# Altium PCB mergePCB.PcbDoc
Units mil, origin at the board's own origin, x right, y up, seen from the top; angles counter-clockwise.
Board outline 3350 x 2750 mil, 2 copper layers (Top Layer, Bottom Layer); 33 components, 30 nets, 147 pads, 8 vias.
Unrouted connection lines stored in the file: 11.
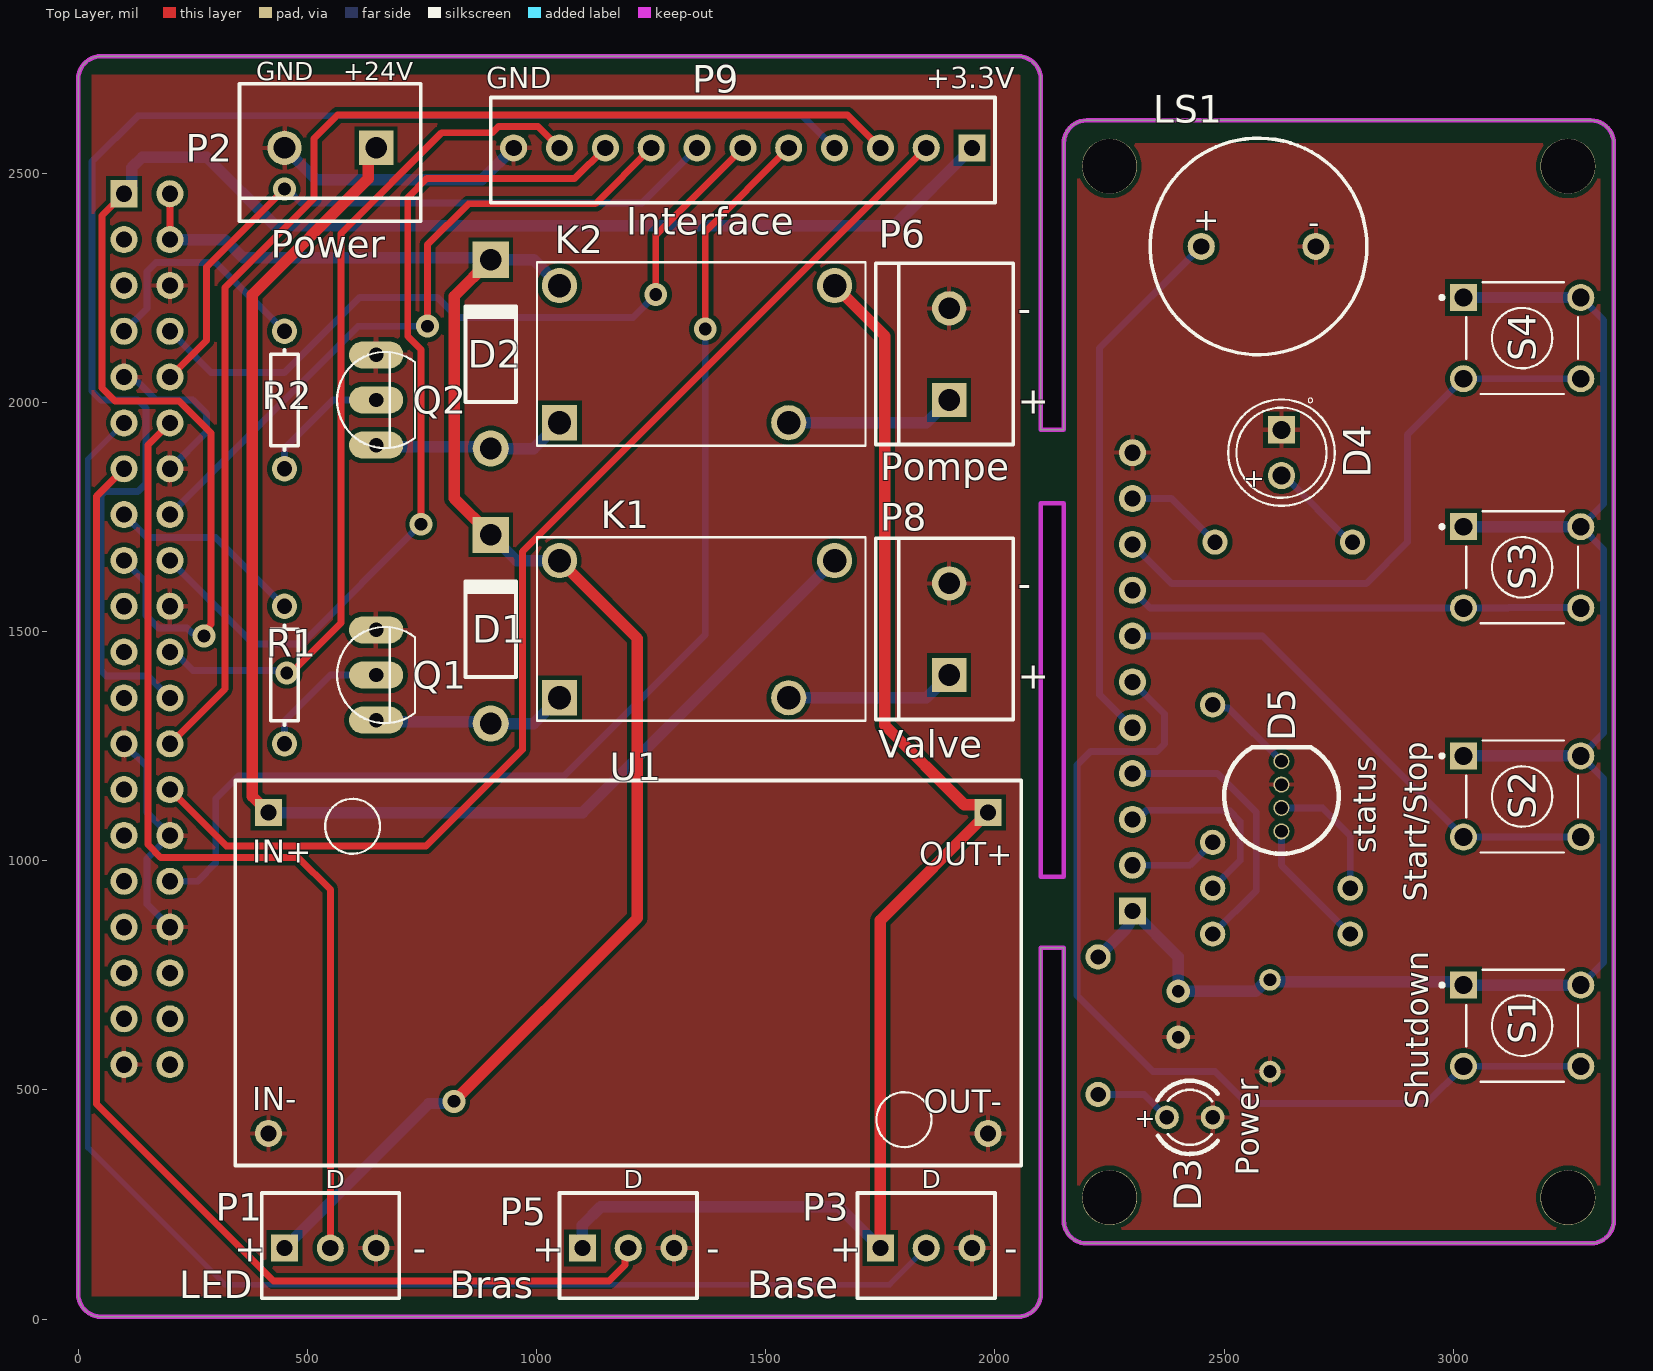
[diagram p0: Top Layer view]
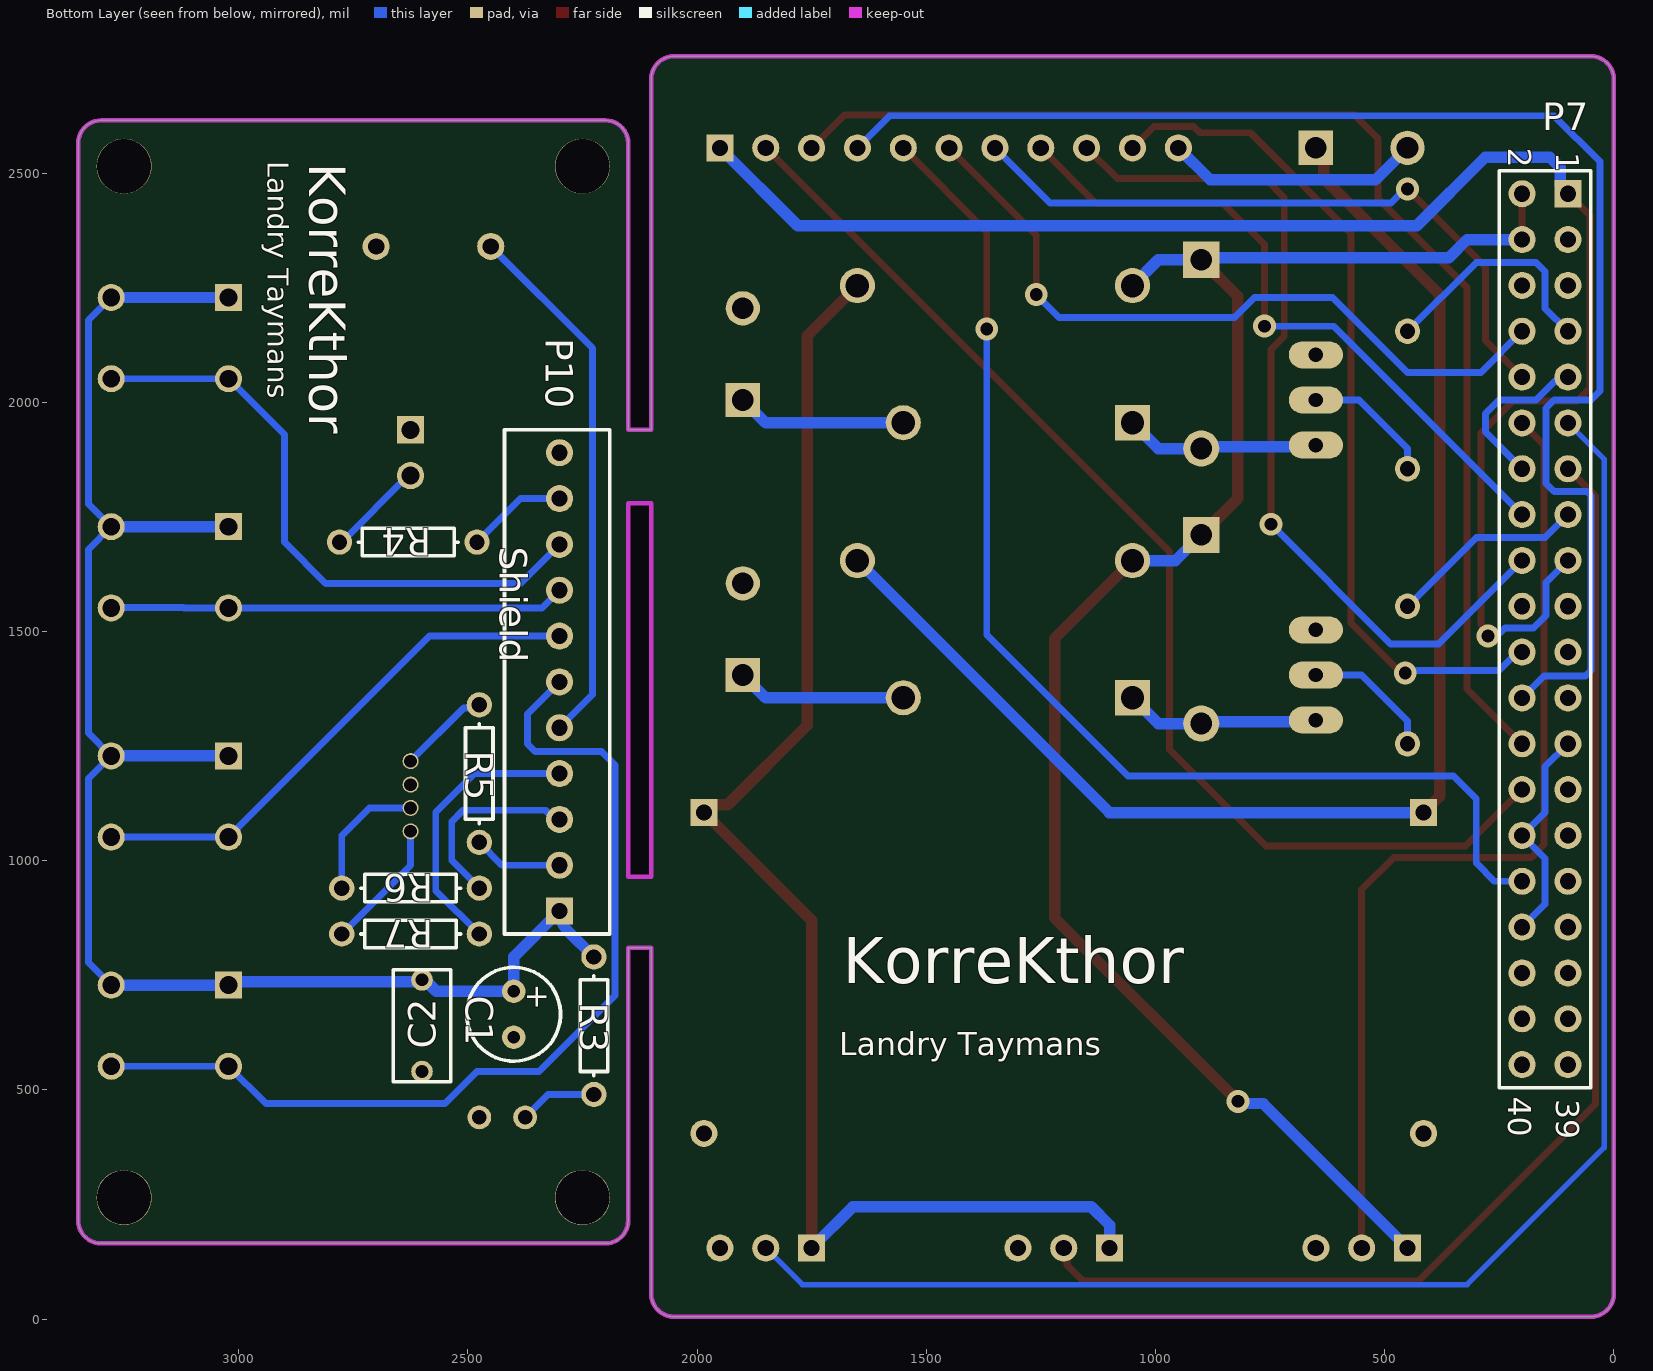
[diagram p1: Bottom Layer view, seen from below]

## Layer stack, top to bottom
Top Solder: solder mask 0.4, Solder Resist, Dk 3.5
Top Layer: signal copper 1.4
Dielectric 1: dielectric 12.6, FR-4, Dk 4.8
Bottom Layer: signal copper 1.4
Bottom Solder: solder mask 0.4, Solder Resist, Dk 3.5

## Board outline
50,5 2050,5 ccw(c2050,55) 2100,55 2100,810 2150,810 2150,215 ccw(c2200,215) 2200,165 3300,165 ccw(c3300,215) 3350,215 3350,2565 ccw(c3300,2565) 3300,2615 2200,2615 ccw(c2200,2565) 2150,2565 2150,1940 2100,1940 2100,2705 ccw(c2050,2705) 2050,2755 50,2755 ccw(c50,2705) 0,2705 0,55 ccw(c50,55)
cut-out: 2100,1780 2100,965 2150,965 2150,1780

## Design rules (kind name [scope] priority, off if disabled: settings)
Clearance [All] p1: gap=10 ignorepadtopadclearanceinfootprint=FALSE except(0: Arc-Hole Track-Hole SMDPad-Hole THPad-Hole Via-Hole Fill-Hole Poly-Hole Region-Hole Text-Hole)
PolygonConnect [All] p1: connectstyle=Relief reliefconductorwidth=10 reliefentries=4 polygonreliefangle="90 Angle" airgapwidth=10
RoutingVias [All] p1: holewidth=28 width=50 viastyle="Through Hole" minholewidth=28 minwidth=50 maxholewidth=28 maxwidth=50
SolderMaskExpansion [All] p1: expansion=4 istentingtop=FALSE
Width [All] p1: maxlimit=50 minlimit=10 preferedwidth=15
30 further rules are at their usual default settings.

## Classes and differential pairs
component class Shield: D1 D2 K1 K2 P1 P2 P3 P5 P6 P7 P8 P9 Q1 Q2 R1 R2 U1
component class Interface: C1 C2 D3 D4 D5 LS1 P10 R3 R4 R5 R6 R7 S1 S2 S3 S4

## Components (designator, comment, footprint, x,y, rotation, side; value= is the part's Value field where it differs from the comment)
C1 "Cap Pol1" Rad5.2 2400,665 r270 bottom value=10u
C2 "Cap" RAD-0.2 2600,640 r270 bottom value=100n
D1 "1N4004" DO-41 900,1505 r90 top
D2 "1N4004" DO-41 900,2105 r90 top
D3 "Power" LED_3MM 2425,440 r0 top
D4 "LED +" LED_5mm 2625,1890 r270 top
D5 "status" "LED RGB" 2625,1140 r90 top
K1 "Relay-SPST" RELAY_OJE-SH_series 1350,1505 r0 top
K2 "Relay-SPST" RELAY_OJE-SH_series 1350,2105 r0 top
LS1 "Buzzer" Buzzer 2575,2340 r0 top
P1 "LED" Conn_1X3 450,155 r0 top
P2 "Power" Bornier_1X2 550,2555 r180 top
P3 "Base" Conn_1X3 1750,155 r0 top
P5 "Bras" Conn_1X3 1100,155 r0 top
P6 "Pompe" Bornier_1X2 1900,2105 r90 top
P7 "Rasberry Pi Connector" HDR2X20 200,2455 r270 bottom
P8 "Valve" Bornier_1X2 1900,1505 r90 top
P9 "Interface" Conn_1X11 1950,2555 r180 top
P10 "Shield" Conn_1X11 2300,890 r90 bottom
Q1 "2N2222" TO-92 650,1405 r90 top
Q2 "2N2222" TO-92 650,2005 r90 top
R1 "Res1" AXIAL-0.3 450,1405 r270 top value=3.9K
R2 "Res1" AXIAL-0.3 450,2005 r270 top value=3.9K
R3 "Res1" AXIAL-0.3 2225,640 r270 bottom value=1k
R4 "Res1" AXIAL-0.3 2630,1695 r0 bottom value=100
R5 "Res1" AXIAL-0.3 2475,1190 r90 bottom value=100
R6 "Res1" AXIAL-0.3 2625,940 r0 bottom value=100
R7 "Res1" AXIAL-0.3 2625,840 r0 bottom value=100
S1 "Shutdown" SW_1825910-6-4 3150,640 r0 top
S2 "Start/Stop" SW_1825910-6-4 3150,1140 r0 top
S3 "Button +" SW_1825910-6-4 3150,1640 r0 top
S4 "Button ++" SW_1825910-6-4 3150,2140 r0 top
U1 "HW-411_Buck_converter" HW-411_Buck_converter 1200,755 r0 top

## Footprints (in the part's own frame and the unit in brackets; to place one, negate y for a bottom-side part, rotate by r counter-clockwise, add the part's x,y. Pads: shape width x height; smd on the part's side, far side on the other; paste and mask are expansions set on the pad)
AXIAL-0.3 [mm] "Axial Device, Thru-Hole; 2 Leads; 0.3 in Pin Spacing"
  round 1.4 hole 0.85: 1(-3.81,0) 2(3.81,0)
  silkscreen extent -2.77,-0.76 2.77,0.76
Bornier_1X2 [mm] "Connector; Header; 3 Position"
  rect 1.9x1.9 hole 1.2: 1(-2.54,0)
  round 1.9 hole 1.2: 2(2.54,0)
  silkscreen extent -5,-3.56 5.03,4.06
Buzzer [mm] "Buzzer 10.2 (Dia.)"
  round 1.5 hole 0.9: 1(-3.175,0) 2(3.175,0)
  silkscreen extent -6,-6 6,6
Conn_1X3 [mm] "Connector; Header; 3 Position"
  rect 1.5x1.5 hole 0.9: 1(0,0)
  round 1.5 hole 0.9: 2(2.54,0) 3(5.08,0)
  silkscreen extent -1.27,-2.79 6.35,3.05
Conn_1X11 [mm] "Connector; Header; 3 Position"
  rect 1.5x1.5 hole 0.9: 1(0,0)
  round 1.5 hole 0.9: 2(2.54,0) 3(5.08,0) 4(7.62,0) 5(10.16,0) 6(12.7,0) 7(15.24,0) 8(17.78,0) 9(20.32,0) 10(22.86,0) 11(25.4,0)
  silkscreen extent -1.27,-2.79 26.67,3.05
DO-41 [mm] "Diode, Axial; Body 5.2 x 2.7 mm (LxDia. max), Lead Dia. 0.86 mm (max)"
  round 2 hole 1.2: 1(-5.23,0)
  rect 2x2 hole 1.2: 2(5.23,0)
  silkscreen extent -2.65,-1.4 2.75,1.4
HDR2X20 [mm] "Connector; Header; 20x2 Position"
  rect 1.5x1.5 hole 0.9: 1(0,2.54)
  round 1.5 hole 0.9: 2(0,0) 3(2.54,2.54) 4(2.54,0) 5(5.08,2.54) 6(5.08,0) 7(7.62,2.54) 8(7.62,0) 9(10.16,2.54) 10(10.16,0) 11(12.7,2.54) 12(12.7,0) 13(15.24,2.54) 14(15.24,0) 15(17.78,2.54) 16(17.78,0) 17(20.32,2.54) 18(20.32,0) 19(22.86,2.54) 20(22.86,0) 21(25.4,2.54) 22(25.4,0) 23(27.94,2.54) 24(27.94,0) 25(30.48,2.54) 26(30.48,0) 27(33.02,2.54) 28(33.02,0) 29(35.56,2.54) 30(35.56,0) 31(38.1,2.54) 32(38.1,0) 33(40.64,2.54) 34(40.64,0) 35(43.18,2.54) 36(43.18,0) 37(45.72,2.54) 38(45.72,0) 39(48.26,2.54) 40(48.26,0)
  silkscreen extent -1.27,-1.27 49.53,3.81
HW-411_Buck_converter [mm] "HW-411 Buck converter Board"
  rect 1.5x1.5 hole 0.9: 1(-19.939,8.89) 3(19.939,8.89)
  round 1.5 hole 0.9: 2(-19.939,-8.89) 4(19.939,-8.89)
  silkscreen extent -21.78,-10.67 21.78,10.67
"LED RGB" [mil] "5mm RGB LED"
  round 35 hole 27.56: 1(77,0) 2(26,0) 3(-25,0) 4(-76,0)
  silkscreen extent -125,-125 107,125
LED_3MM [mil]
  round 52 hole 32: 1(-50,0) 2(50,0)
  silkscreen extent -71,-80 61,80
LED_5mm [mm]
  round 1.508 hole 1: 1(1.27,0)
  rect 1.508x1.508 hole 1: 2(-1.27,0)
  silkscreen extent -3.03,-2.95 2.95,2.95
Rad5.2 [mm] "Capacitor (Radial); 2 Leads; 5.2 (Dia.)"
  round 1.3 hole 0.7: 1(-1.27,0) 2(1.27,0)
  silkscreen extent -2.6,-2.6 2.6,2.6
RAD-0.2 [mm] "Radial Cap, Thru-Hole; 2 Leads; 0.2 in Pin Spacing"
  round 1.2 hole 0.7: 1(-2.54,0) 2(2.54,0)
  silkscreen extent -3.1,-1.6 3.1,1.6
RELAY_OJE-SH_series [mm] "Relay_SPST"
  round 1.95 hole 1.3: 1(7.62,3.8) 2(5.08,-3.8) 3(-7.62,3.8)
  rect 1.95x1.95 hole 1.3: 4(-7.62,-3.8)
  silkscreen extent -8.87,-5.08 9.33,5.1
SW_1825910-6-4 [mm]
  rect 1.498x1.498 hole 0.99: 1(-3.25,2.25)
  round 1.498 hole 0.99: 1(3.25,2.25) 2(-3.25,-2.25) 2(3.25,-2.25)
  silkscreen extent -4.54,-3.1 3.1,3.1
TO-92 [mm]
  oval 1.5x3 hole 0.8: 1(-2.5,0) 2(0,0) 3(2.5,0)
  silkscreen extent -2.67,-2.15 2.66,2.17

## Part data
C1: "Polarized Capacitor (Radial)", LatestRevisionDate=17-Jul-2002, LatestRevisionNote="Re-released for DXP Platform.", PackageDescription="Polarized Capacitor (Radial); 2 Leads", PackageReference=RB7.6-15, Published=8-Jun-2000, Publisher="Altium Limited"
C2: "Capacitor", LatestRevisionDate=17-Jul-2002, LatestRevisionNote="Re-released for DXP Platform.", PackageDescription="Radial Cap, Thru-Hole; 2 Leads; 0.3 in Pin Spacing", PackageReference=RAD-0.3, Published=8-Jun-2000, Publisher="Altium Limited"
D1 D2: library part "Diode 1N4004", "1 Amp General Purpose Rectifier", Code_JEDEC=DO-204-AL, ComponentLink1Description="Manufacturer Link", ComponentLink1URL=http://www.fairchildsemi.com/, ComponentLink2Description=Datasheet, ComponentLink2URL=http://www.fairchildsemi.com/ds/1N%2F1N4001.pdf, DatasheetVersion=1998, LatestRevisionDate=17-Jul-2002, LatestRevisionNote="Re-released for DXP Platform.", PackageDescription="Diode, Axial; Body 5.2 x 2.7 mm (LxDia. max), Lead Dia. 0.86 mm (max)", PackageReference=DO-41, PackageVersion=Aug-1999, Published=8-Jun-2000, Publisher="Altium Limited"
D3 D4: library part LED0, "Typical INFRARED GaAs LED", LatestRevisionDate=08-Jul-2005, LatestRevisionNote="Mech Layer 1 removed.", PackageDescription="LED; 2 Leads", PackageReference=LED-0, Published=8-Jun-2000, Publisher="Altium Limited"
D5: library part LED_RGB, "Typical INFRARED GaAs LED", LatestRevisionDate=08-Jul-2005, LatestRevisionNote="Mech Layer 1 removed.", PackageDescription="LED; 2 Leads", PackageReference=LED-0, Published=8-Jun-2000, Publisher="Altium Limited"
K1 K2: "Single-Pole Single-Throw Relay", LatestRevisionDate=17-Jul-2002, LatestRevisionNote="Re-released for DXP Platform.", PackageReference=MODULE4, Published=24-Mar-1999, Publisher="Altium Limited"
LS1: "Magnetic Transducer Buzzer", ComponentLink1Description="Manufacturer Link", ComponentLink1URL=http://www.megastar.com/linecard/buzzmode/index.php, DatasheetVersion=17-Dec-2003, LatestRevisionDate=17-Dec-2003, LatestRevisionNote="Schematic revised, PCB Footprint replaced.", PackageDescription="Magnetic Transducer Buzzer", PackageReference=ABSM-1574, Published=24-Mar-1999, Publisher="Altium Limited"
P1 P3 P5: library part "Header 3", "Header, 3-Pin", LatestRevisionDate=17-Jul-2002, LatestRevisionNote="Re-released for DXP Platform.", Publisher="Altium Limited"
P2 P6 P8: library part "Header 2", "Header, 2-Pin", LatestRevisionDate=17-Jul-2002, LatestRevisionNote="Re-released for DXP Platform.", Publisher="Altium Limited"
P7: library part MHDR2X20, "Header, 20-Pin, Dual row", LatestRevisionDate=17-Jul-2002, LatestRevisionNote="Re-released for DXP Platform.", Publisher="Altium Limited"
P9 P10: library part "Header 11", "Header, 11-Pin", LatestRevisionDate=17-Jul-2002, LatestRevisionNote="Re-released for DXP Platform.", Publisher="Altium Limited"
Q1 Q2: library part NPN, "NPN Bipolar Transistor", Code_JEDEC=TO-226-AA, LatestRevisionDate=17-Jul-2002, LatestRevisionNote="Re-released for DXP Platform.", PackageDescription="TO, Flat Index; 3 In-Line, Axial Leads; Body Dia. 4.8mm; Leads 0.55 x 0.51 mm (max)", PackageReference=TO-226-AA, Published=8-Jun-2000, Publisher="Altium Limited"
R1 R2 R3 R4 R5 R6 R7: "Resistor", LatestRevisionDate=17-Jul-2002, LatestRevisionNote="Re-released for DXP Platform.", PackageDescription="Axial Device, Thru-Hole; 2 Leads; 0.3 in Pin Spacing", PackageReference=AXIAL-0.3, Published=8-Jun-2000, Publisher="Altium Limited"
S1 S2 S3 S4: library part SW-PB, "Switch", LatestRevisionDate=17-Jul-2002, LatestRevisionNote="Re-released for DXP Platform.", PackageDescription="Switch; 2 Leads", PackageReference=SPST-2, Published=24-Mar-1999, Publisher="Altium Limited"
U1: "Buck converter board"

## Free pads (board coordinates)
  round 120 hole 118.11: 1(2250,265) 1(2250,2515) 1(3250,265) 1(3250,2515)

## Via types
v1: diameter 50, hole 28, Top Layer to Bottom Layer, 8 vias

## Nets (pads, with @x,y where several pads share a name; then routed paths per layer and width w, separated by ;. In a path a pad name is that pad's centre, name@x,y a point inside that pad or via, vN(x,y) a via of type N, cw(c..) or ccw(c..) an arc to the next point about the centre after c; other vN are vias at no path point)
+3.3: C1.1 C2.1 P7.1 P7.17 P9.1 P10.1 R3.1 S1.1 S2.1 S3.1 S4.1 | length 7124.1
  Top Layer w15: P7.1 52,2407 52,2031 80,2003 220,2003 290,1933 290,1515.67 274.15,1499.82 v1(274.15,1490.35)
  Bottom Layer w15: P7.17 148,1607 148,1535 175.03,1507.97 237.03,1507.97 247.95,1497.05 267.45,1497.05 v1(274.15,1490.35) ; S1.1@3277.95,728.58 3327.5,778.13 3327.5,1179.03 3277.95,1228.58 3327.5,1278.13 3327.5,1679.03 3277.95,1728.58 3327.5,1778.13 3327.5,2179.03 S4.1@3277.95,2228.58
  Bottom Layer w25: P7.1 117.03,2472.03 117.03,2512.03 140,2535 280,2535 430,2385 1780,2385 P9.1 ; R3.1 2282.32,847.32 ccw(c2239.64,890) P10.1 2400,790 C1.1 2568.98,715 2593.98,740 C2.1 2604.26,735.74 3014.89,735.74 3022.05,728.58 S1.1@3277.95,728.58 ; S2.1@3022.05,1228.58 S2.1@3277.95,1228.58 ; S3.1@3022.05,1728.58 S3.1@3277.95,1728.58 ; S4.1@3022.05,2228.58 S4.1@3277.95,2228.58
+5: D1.2 D2.2 K1.3 K2.3 P1.1 P7.2 P7.4 | length 3749.4
  Top Layer w15: P7.4 P7.2
  Top Layer w25: v1(820,475) 1220,875 1220,1484.61 K1.3 ; D1.2 820,1790.91 820,2230.91 D2.2
  Bottom Layer w25: P7.4 320,2355 360,2315 895.91,2315 D2.2 993.7,2310.91 K2.3 ; P1.1 765.22,470.22 815.22,470.22 v1(820,475) ; D1.2 956.3,1654.61 K1.3
+24: K1.1 P2.1 U1.1 | length 3039
  Top Layer w25: U1.1 380,1140 380,2235 632.97,2487.97 632.97,2537.97 P2.1
  Bottom Layer w25: U1.1 1100.39,1105 K1.1
GND: C1.2 C2.2 D3.2 D4.2 D5.2 LS1.2 P1.3 P2.2 P3.3 P5.3 P6.2 P7.6 P7.9 P7.14 P7.20 P7.25 P7.30 P7.34 P7.39 P8.2 P9.11 P10.11 Q1.3 Q2.3 U1.2 U1.4 | length 1407.1
  Bottom Layer w15: P7.25 150,1205 150,1105 P7.30 150,1005 150,905 P7.34 ; P7.9 108.43,2046.57 128.43,2046.57 170,2005 250,2005 280,1975 280,1935 P7.14
  Bottom Layer w25: P2.2 520,2485 880,2485 P9.11
GPIO1: P7.28 P9.2 P10.2 R5.1 | length 2780.6
  Top Layer w15: P7.28 323,1032 759,1032 969,1242 969,1674 P9.2
  Bottom Layer w15: P10.2 2425,990 R5.1
GPIO4: P7.7 R2.1 | length 521.1
  Bottom Layer w15: P7.7 150,2205 150,2285 170,2305 300,2305 R2.1
GPIO7: P7.26 P9.3 P10.3 R6.1 | length 3161.3
  Top Layer w15: P7.26 320,1375 320,2250.28 514.5,2444.78 514.5,2575.5 566.03,2627.03 1677.97,2627.03 P9.3
  Bottom Layer w15: P10.3 2310.81,1090 2330.81,1110 2510.61,1110 2535,1085.61 2535,1000 R6.1
GPIO8: P7.24 P9.4 P10.4 R7.1 | length 3762.9
  Bottom Layer w15: P7.24 152,1403 62,1403 50,1415 50,1796.21 58.79,1805 130,1805 148,1823 148,1987 130,2005 50,2005 30,2025 30,2525 130,2625 1580,2625 P9.4 ; P10.4 2485,1190 2570,1105 2570,935 R7.1
GPIO12: LS1.1 P7.32 P9.5 P10.5 | length 3782
  Top Layer w15: v1(1368,2160) 1368,2373 P9.5
  Bottom Layer w15: P7.32 260,955 300,995 300,1135 350,1185 1060,1185 1368,1493 v1(1368,2160) ; P10.5 2227.97,1362.03 2227.97,2117.97 LS1.1
GPIO14: P7.8 P9.6 P10.6 S1.2 | length 3709.9
  Top Layer w15: v1(1260,2235) 1260,2365 P9.6
  Bottom Layer w15: P7.8 290,2065 450,2065 613.5,2228.5 783.76,2228.5 827.26,2185 1210,2185 v1(1260,2235) ; P10.6 2370,1320 2370,1255 2353,1238 2208,1238 2179,1209 2179,706 2345,540 2480,540 2550,470 2940.63,470 3022.05,551.42 S1.2@3277.95,551.42
GPIO15: P7.10 P9.7 P10.7 S2.2 | length 2635.3
  Top Layer w15: P7.10 280,2135 280,2295 v1(450,2465)
  Bottom Layer w15: v1(450,2465) 456.29,2465 486.29,2435 1230,2435 P9.7 ; P10.7 2583.47,1490 3022.05,1051.42 S2.2@3277.95,1051.42
GPIO17: P3.2 P7.11 | length 3599.7
  Bottom Layer w12: P7.11 21,1876 21,374 320,75 1770,75 P3.2
GPIO18: P1.2 P7.12 | length 2160.5
  Top Layer w15: P7.12 152,1907 152,1035 180,1007 480,1007 550,937 P1.2
GPIO22: P7.15 R1.1 | length 432.8
  Bottom Layer w15: P7.15 150,1705 300,1705 R1.1
GPIO23: P7.16 P9.8 P10.8 S3.2 | length 2480.1
  Top Layer w15: v1(762,2166) 762,2344 851,2433 1128,2433 P9.8
  Bottom Layer w15: P7.16 611,2166 v1(762,2166) ; P10.8 2338.58,1551.42 3022.05,1551.42 3119.42,1551.42 3120,1552 3277.37,1552 S3.2@3277.95,1551.42
GPIO24: P7.18 P9.9 P10.9 S4.2 | length 3267.6
  Top Layer w15: v1(748,1734) 748,2115 719,2144 719,2447 760,2488 1083,2488 P9.9
  Bottom Layer w15: P7.18 382,1473 487,1473 v1(748,1734) ; P10.9 2385,1605 2810,1605 2900,1695 2900,1929.37 3022.05,2051.42 S4.2@3277.95,2051.42
GPIO25: P7.22 P9.10 P10.10 R4.1 | length 2099.2
  Top Layer w15: v1(455,1409.61) 464.22,1409.61 573,1518.39 573,2368 793,2588 903,2588 917.03,2602.03 1002.97,2602.03 P9.10
  Bottom Layer w15: P7.22 210,1455 250,1415 449.61,1415 v1(455,1409.61) ; P10.10 2385,1790 R4.1
GPIO27: P5.2 P7.13 | length 2778.2
  Top Layer w15: P7.13 40,1795 40,469 426.03,82.97 1157.97,82.97 1193.21,118.21 1193.21,148.21 P5.2
NetD1_1: D1.1 K1.4 Q1.1 | length 426.4
  Bottom Layer w25: Q1.1 653.74,1302.83 896.26,1302.83 D1.1 993.7,1299.09 K1.4
NetD2_1: D2.1 K2.4 Q2.1 | length 426.4
  Bottom Layer w25: Q2.1 653.74,1902.83 896.26,1902.83 D2.1 993.7,1899.09 K2.4
NetD3_1: D3.1 R3.2 | length 170.7
  Bottom Layer w15: R3.2 2325,490 D3.1
NetD4_1: D4.1 R4.2 | length 215.1
  Bottom Layer w15: D4.1 2630,1840 2775,1695 R4.2
NetD5_1: D5.1 R5.2 | length 200.9
  Bottom Layer w15: R5.2 2481.9,1333.1 2508.9,1333.1 D5.1
NetD5_3: D5.3 R6.2 | length 289.9
  Bottom Layer w15: D5.3 2715,1115 2775,1055 R6.2
NetD5_4: D5.4 R7.2 | length 286.1
  Bottom Layer w15: D5.4 2625,990 R7.2
NetQ1_2: Q1.2 R1.2 | length 291.4
  Bottom Layer w15: R1.2 450,1305 550,1405 Q1.2
NetQ2_2: Q2.2 R2.2 | length 287.9
  Bottom Layer w15: R2.2 450,1899 556,2005 Q2.2
Pompe: K2.2 P6.1 | length 370.5
  Bottom Layer w25: K2.2 1850.39,1955.39 P6.1
Valve: K1.2 P8.1 | length 370.5
  Bottom Layer w25: K1.2 1850.39,1355.39 P8.1
VCC: K2.1 P3.1 P5.1 U1.3 | length 3110.1
  Top Layer w25: K2.1 1760,2144.61 1760,1295 1932.97,1122.03 1967.97,1122.03 U1.3 1750,870 P3.1
  Bottom Layer w25: P5.1 1100,205 1140,245 1660,245 P3.1
pads on no net: P7.3 P7.5 P7.19 P7.21 P7.23 P7.27 P7.29 P7.31 P7.33 P7.35 P7.36 P7.37 P7.38 P7.40

## Polygon pours and split planes (outlines as drawn)
GND on Top Layer "GND_plane" (solid, pour order 1): 2180,2565 3320,2565 3320,195 2180,195 2180,225
GND on Top Layer "GND_L01_P002" (solid, pour order 2): 2055,50 2055,2720 2050,2715 30,2715 30,50

## Keep-outs
Keep-Out Layer:
  lines w10: 0,55 ccw(c50,55) 50,5 2050,5 ccw(c2050,55) 2100,55 2100,810 2150,810 2150,215 ccw(c2200,215) 2200,165 3300,165 ccw(c3300,215) 3350,215 3350,2565 ccw(c3300,2565) 3300,2615 2200,2615 ccw(c2200,2565) 2150,2565 2150,1940 2100,1940 2100,2705 ccw(c2050,2705) 2050,2755 50,2755 ccw(c50,2705) 0,2705 0,55 ; 2100,965 2100,1780 2150,1780 2150,965 2100,965

## Silkscreen, mask and mechanical layers (free items; w line width, h text height)
Top Overlay:
  text "GND" at 388,2703 h40
  text "+24V" at 578,2703 h40
  text "GND" at 890,2685 h45
  text "+3.3V" at 1850,2685 h45
  text "-" at 2050,2175.01 h60
  text "+" at 2050,1975 h60
  text "-" at 2050,1575.01 h60
  text "+" at 2050,1375 h60
  text "D" at 540,285 h40
  text "D" at 1190,285 h40
  text "D" at 1840,285 h40
  text "+" at 340,125 h60
  text "-" at 730,125.01 h60
  text "+" at 990,125 h60
  text "-" at 1370,125.01 h60
  text "+" at 1640,125 h60
  text "-" at 2020,125.01 h60
Bottom Overlay:
  text "Landry Taymans" at 2936,2526 h45 r90
  text "KorreKthor" at 2846,2521 h80 r90
  text "KorreKthor" at 1682,733 h100
  text "Landry Taymans" at 1690,575 h50

## Dimensions
50,5 to 50,2755 on Top Paste
0,55 to 3350,155 on Top Paste

## Text inside footprints (layer, text, board x,y; h text height)
C1: Bottom Overlay "+" at 2370.33,732 h50 r90
D3: Top Overlay "+" at 2305,418.34 h40
D4: Top Overlay "+" at 2548.34,1855 h40 r270
LS1: Top Overlay "-" at 2683,2368.01 h50; Top Overlay "+" at 2433,2374.67 h50
P7: Bottom Overlay "2" at 230,2555 h50 r90; Bottom Overlay "40" at 230,485 h50 r90; Bottom Overlay "39" at 125,480 h50 r90; Bottom Overlay "1" at 125,2545 h50 r90
U1: Top Overlay "OUT+" at 1835,990 h50; Top Overlay "OUT-" at 1845,450 h50; Top Overlay "IN-" at 380,455 h50; Top Overlay "IN+" at 380,995 h50